# Altium PCB Speedometer_Tech.PcbDoc
Units mm, origin at the board's own origin, x right, y up, seen from the top; angles counter-clockwise.
Board outline 309.2 x 103.7 mm, 2 copper layers (Top Layer, Bottom Layer); 82 components, 96 nets, 507 pads, 0 vias.
Unrouted connection lines stored in the file: 137.
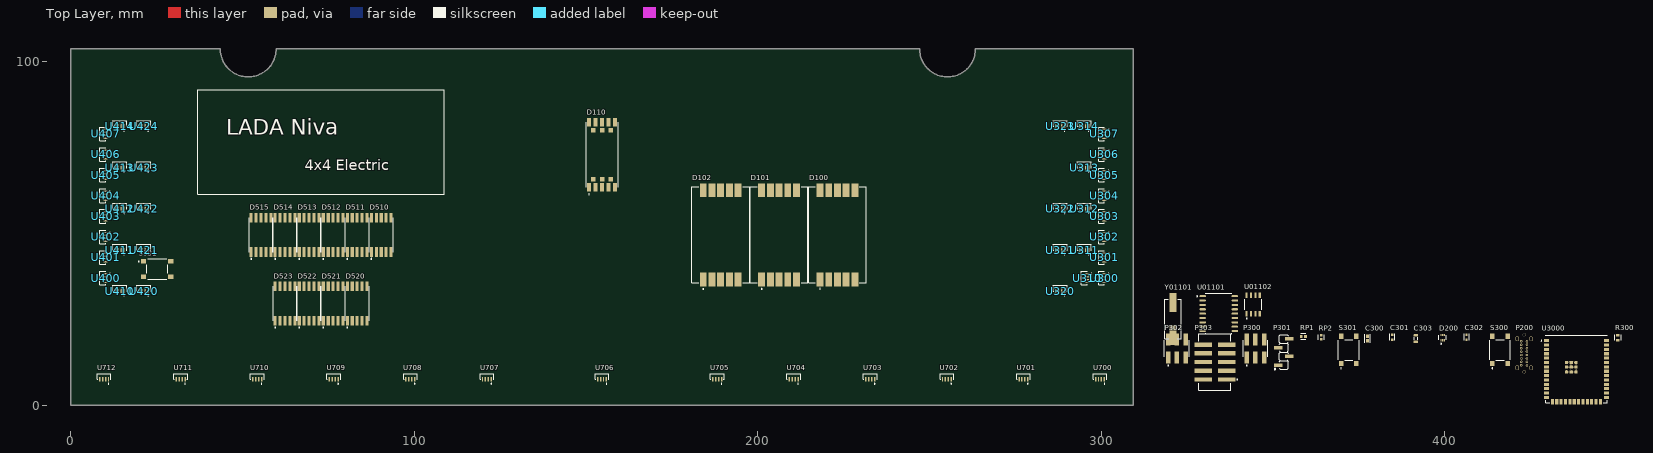
[diagram p0: Top Layer view]
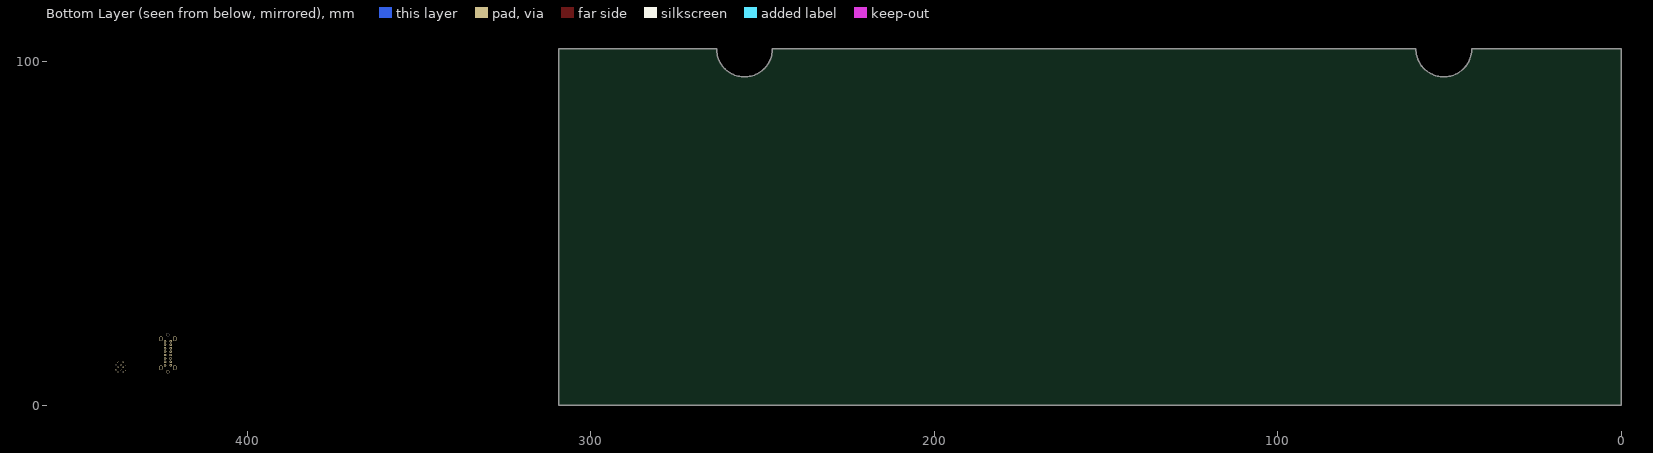
[diagram p1: Bottom Layer view, seen from below]

## Layer stack, top to bottom
Top Solder: solder mask 0.0102, Solder Resist, Dk 3.5
Top Layer: signal copper 0.0356
Dielectric 1: dielectric 0.32, FR-4, Dk 4.8
Bottom Layer: signal copper 0.0356
Bottom Solder: solder mask 0.0102, Solder Resist, Dk 3.5

## Board outline
0,0 0,103.7 43.45,103.7 ccw(c51.575,103.7) 59.7,103.7 247.05,103.7 ccw(c255.175,103.7) 263.3,103.7 309.2,103.7 309.2,0

## Design rules (kind name [scope] priority, off if disabled: settings)
Clearance [All] p1: gap=0.254 ignorepadtopadclearanceinfootprint=FALSE
PolygonConnect [All] p1: connectstyle=Relief reliefconductorwidth=0.254 reliefentries=4 polygonreliefangle="90 Angle" airgapwidth=0.254
RoutingVias [All] p1: holewidth=0.711 width=1.27 viastyle="Through Hole" minholewidth=0.711 minwidth=1.27 maxholewidth=0.711 maxwidth=1.27
SolderMaskExpansion [All] p1: expansion=0.102 istentingtop=FALSE
Width [All] p1: maxlimit=0.254 minlimit=0.254 preferedwidth=0.254
30 further rules are at their usual default settings.

## Classes and differential pairs
component class 70_Signalleuchten: U700 U701 U702 U703 U704 U705 U706 U707 U708 U709 U710 U711 U712
component class 40_Temp: U400 U401 U402 U403 U404 U405 U406 U407 U410 U411 U412 U413 U414 U420 U421 U422 U423 U424
component class 30_SOC: U300 U301 U302 U303 U304 U305 U306 U307 U310 U311 U312 U313 U314 U320 U321 U322 U323
component class 90_CAN: C0101 C01101 C01102 C01103 C01104 C01105 L0101 Q0101 R0105 R0106 R01101 U01101 U01102 Y01101
component class 10_Speed: D100 D101 D102 D110
component class 110_ESP32s3: C300 C301 C302 C303 D200 P200 P300 P301 P302 P303 R300 RP1 RP2 S300 S301 U3000
component class 50_Distance: D510 D511 D512 D513 D514 D515 D520 D521 D522 D523 S501

## Components (designator, comment, footprint, x,y, rotation, side; value= is the part's Value field where it differs from the comment)
C300 "GMK107BJ104KAHT" FP-0603-L_1_6_0_1-W_0_8_0-IPC_B 377.444,19.42 r90 top
C301 "1uF" FP-CGA3E-0_3-0_1-MFG 384.683,19.801 r90 top
C302 "1uF" FP-CGA3E-0_3-0_1-MFG 406.273,19.801 r90 top
C303 "Capacitor 22µF +/-40% 16V 0805" CAPC0805(2012)145_L 391.541,19.42 r90 top value=22µF
D100 "28mm 7-Segment" GS8011AR-G 223.133,49.6 r0 top
D101 "28mm 7-Segment" GS8011AR-G 206.133,49.6 r0 top
D102 "28mm 7-Segment" GS8011AR-G 189.133,49.6 r0 top
D110 "19mm 14-Segment, Alphanummerical" GS4011AG-G 154.6,72.898 r0 top
D200 "TPD2E1B06DRLR" FP-DRL0006A-MFG 399.288,19.674 r90 top
D510 "10mm 7-Segment" GS2011AG-G 90.32,49.6 r0 top
D511 "10mm 7-Segment" GS2011AG-G 83.32,49.6 r0 top
D512 "10mm 7-Segment" GS2011AG-G 76.32,49.6 r0 top
D513 "10mm 7-Segment" GS2011AG-G 69.32,49.6 r0 top
D514 "10mm 7-Segment" GS2011AG-G 62.32,49.6 r0 top
D515 "10mm 7-Segment" GS2011AG-G 55.32,49.6 r0 top
D520 "10mm 7-Segment" GS2011AG-G 83.32,29.6 r0 top
D521 "10mm 7-Segment" GS2011AG-G 76.32,29.6 r0 top
D522 "10mm 7-Segment" GS2011AG-G 69.32,29.6 r0 top
D523 "10mm 7-Segment" GS2011AG-G 62.32,29.6 r0 top
P200 "TYPEC-300D-BCP16H100" TYPEC-300D-BCP16H100-Footprint-1 423.037,15.102 r90 top
P300 "5-146130-2" TECO-5-146130-2_V 344.805,16.499 r0 top
P301 "M20-8770442R" HARWIN_M20-8770442R 353.06,15.483 r90 top
P302 "5-146130-2" TECO-5-146130-2_V 321.945,16.499 r0 top
P303 "HTSS-105-01-L-DV" SMTC-HTSS-105-01-X-DV 332.994,12.562 r90 top
R300 "1kΩ" FP-CRCW0603-e3-MFG 450.342,19.674 r90 top
RP1 "CRCW06035K10FKEA" FP-CRCW0603-e3-IPC_C 358.775,20.055 r0 top
RP2 "CRCW06035K10FKEA" FP-CRCW0603-e3-IPC_C 363.982,19.801 r90 top
S300 "" FP-PTS645SM43SMTR92LFS-MFG 416.052,16.118 r90 top
S301 "" FP-PTS645SM43SMTR92LFS-MFG 371.983,16.118 r90 top
S501 "" FP-PTS645SM43SMTR92LFS-MFG 25.1,39.6 r0 top
U300 "WS2812B-4020_2" LED_WS2812B-4020 300,37 r90 top
U301 "WS2812B-4020_2" LED_WS2812B-4020 300,43 r90 top
U302 "WS2812B-4020_2" LED_WS2812B-4020 300,49 r90 top
U303 "WS2812B-4020_2" LED_WS2812B-4020 300,55 r90 top
U304 "WS2812B-4020_2" LED_WS2812B-4020 300,61 r90 top
U305 "WS2812B-4020_2" LED_WS2812B-4020 300,67 r90 top
U306 "WS2812B-4020_2" LED_WS2812B-4020 300,73 r90 top
U307 "WS2812B-4020_2" LED_WS2812B-4020 300,79 r90 top
U310 "WS2812B-4020_2" LED_WS2812B-4020 295,37 r90 top
U311 "WS2812B-4020_2" LED_WS2812B-4020 295,46 r0 top
U312 "WS2812B-4020_2" LED_WS2812B-4020 295,58 r0 top
U313 "WS2812B-4020_2" LED_WS2812B-4020 295,70 r0 top
U314 "WS2812B-4020_2" LED_WS2812B-4020 295,82 r0 top
U320 "WS2812B-4020_2" LED_WS2812B-4020 288,34 r0 top
U321 "WS2812B-4020_2" LED_WS2812B-4020 288,46 r0 top
U322 "WS2812B-4020_2" LED_WS2812B-4020 288,58 r0 top
U323 "WS2812B-4020_2" LED_WS2812B-4020 288,82 r0 top
U400 "WS2812B-4020_2" LED_WS2812B-4020 9.2,37 r90 top
U401 "WS2812B-4020_2" LED_WS2812B-4020 9.2,43 r90 top
U402 "WS2812B-4020_2" LED_WS2812B-4020 9.2,49 r90 top
U403 "WS2812B-4020_2" LED_WS2812B-4020 9.2,55 r90 top
U404 "WS2812B-4020_2" LED_WS2812B-4020 9.2,61 r90 top
U405 "WS2812B-4020_2" LED_WS2812B-4020 9.2,67 r90 top
U406 "WS2812B-4020_2" LED_WS2812B-4020 9.2,73 r90 top
U407 "WS2812B-4020_2" LED_WS2812B-4020 9.2,79 r90 top
U410 "WS2812B-4020_2" LED_WS2812B-4020 14.2,34 r0 top
U411 "WS2812B-4020_2" LED_WS2812B-4020 14.2,46 r0 top
U412 "WS2812B-4020_2" LED_WS2812B-4020 14.2,58 r0 top
U413 "WS2812B-4020_2" LED_WS2812B-4020 14.2,70 r0 top
U414 "WS2812B-4020_2" LED_WS2812B-4020 14.2,82 r0 top
U420 "WS2812B-4020_2" LED_WS2812B-4020 21.2,34 r0 top
U421 "WS2812B-4020_2" LED_WS2812B-4020 21.2,46 r0 top
U422 "WS2812B-4020_2" LED_WS2812B-4020 21.2,58 r0 top
U423 "WS2812B-4020_2" LED_WS2812B-4020 21.2,70 r0 top
U424 "WS2812B-4020_2" LED_WS2812B-4020 21.2,82 r0 top
U700 "WS2812B-4020_2" LED_WS2812B-4020 299.556,8.35 r0 top
U701 "WS2812B-4020_2" LED_WS2812B-4020 277.269,8.35 r0 top
U702 "WS2812B-4020_2" LED_WS2812B-4020 254.982,8.35 r0 top
U703 "WS2812B-4020_2" LED_WS2812B-4020 232.695,8.35 r0 top
U704 "WS2812B-4020_2" LED_WS2812B-4020 210.408,8.35 r0 top
U705 "WS2812B-4020_2" LED_WS2812B-4020 188.122,8.35 r0 top
U706 "WS2812B-4020_2" LED_WS2812B-4020 154.6,8.35 r0 top
U707 "WS2812B-4020_2" LED_WS2812B-4020 121.078,8.35 r0 top
U708 "WS2812B-4020_2" LED_WS2812B-4020 98.791,8.35 r0 top
U709 "WS2812B-4020_2" LED_WS2812B-4020 76.504,8.35 r0 top
U710 "WS2812B-4020_2" LED_WS2812B-4020 54.217,8.35 r0 top
U711 "WS2812B-4020_2" LED_WS2812B-4020 31.931,8.35 r0 top
U712 "WS2812B-4020_2" LED_WS2812B-4020 9.644,8.35 r0 top
U01101 "MCP2515-I/SO" FP-C04-051-MFG 334.137,26.659 r0 top
U01102 "MCP2562FDT-E/SN" FP-C04-057-SN-MFG 344.17,29.326 r90 top
U3000 "ESP32WroomS3" ESP32WroomS3 429.514,18.785 r0 top
Y01101 "ABLS-16.000MHZ-K4T" FP-ABLS-MFG 320.802,25.135 r90 top

## Footprints (in the part's own frame and the unit in brackets; to place one, negate y for a bottom-side part, rotate by r counter-clockwise, add the part's x,y. Pads: shape width x height; smd on the part's side, far side on the other; paste and mask are expansions set on the pad)
CAPC0805(2012)145_L [mm] "Chip Capacitor, Body 2.0x1.2mm, Height 1.45mm, IPC High Density"
  rrect25% 0.76x1.3 smd: 1(-0.9,0) 2(0.89,0)
  silkscreen extent -0.3,-0.55 0.3,0.55, body extent -1,-0.6 1,0.6, height 1.45
ESP32WroomS3 [mm]
  rect 1.5x0.9 smd: 1(0,0) 2(0,-1.27) 3(0,-2.54) 4(0,-3.81) 5(0,-5.08) 6(0,-6.35) 7(0,-7.62) 8(0,-8.89) 9(0,-10.16) 10(0,-11.43) 11(0,-12.7) 12(0,-13.97) 13(0,-15.24) 14(0,-16.51) 27(17.5,-16.51) 28(17.5,-15.24) 29(17.5,-13.97) 30(17.5,-12.7) 31(17.5,-11.43) 32(17.5,-10.16) 33(17.5,-8.89) 34(17.5,-7.62) 35(17.5,-6.35) 36(17.5,-5.08) 37(17.5,-3.81) 38(17.5,-2.54) 39(17.5,-1.27) 40(17.5,0)
  rect 0.9x1.5 smd: 15(1.765,-17.76) 16(3.035,-17.76) 17(4.305,-17.76) 18(5.575,-17.76) 19(6.845,-17.76) 20(8.115,-17.76) 21(9.385,-17.76) 22(10.655,-17.76) 23(11.925,-17.76) 24(13.195,-17.76) 25(14.465,-17.76) 26(15.735,-17.76)
  rect 0.9x0.9 smd: 41(5.85,-9.12) 41(5.85,-7.72) 41(5.85,-6.32) 41(7.25,-9.12) 41(7.25,-7.72) 41(7.25,-6.32) 41(8.65,-9.12) 41(8.65,-7.72) 41(8.65,-6.32)
  round 0.4 hole 0.2 mask+0: 41(5.85,-8.42) 41(5.85,-7.02) 41(6.55,-9.12) 41(6.55,-7.72) 41(6.55,-6.32) 41(7.25,-8.42) 41(7.25,-7.02) 41(7.95,-9.12) 41(7.95,-7.72) 41(7.95,-6.32) 41(8.65,-8.42) 41(8.65,-7.02)
  silkscreen extent -1.55,-18.01 17.78,1.52, body extent -0.24,-17.98 17.76,1.22, height 3.35
FP-0603-L_1_6_0_1-W_0_8_0-IPC_B [mm]
  rect 1.058x0.912 smd paste+0 mask+0: 1(-0.677,0) 2(0.677,0)
  silkscreen extent -1.21,-0.86 1.21,0.86, body extent -1.46,-0.71 1.46,0.71, height 0.25
FP-ABLS-MFG [mm]
  rect 5.6x2.1 smd paste+0 mask+0: 1(-4.75,0) 2(4.75,0)
  silkscreen extent -5.77,-2.42 5.77,2.42, body extent -7.65,-2.52 7.65,2.52, height 0.25
FP-C04-051-MFG [mm]
  rrect100% 1.9x0.6 smd paste+0 mask+0: 1(-4.7,5.08) 2(-4.7,3.81) 3(-4.7,2.54) 4(-4.7,1.27) 5(-4.7,0) 6(-4.7,-1.27) 7(-4.7,-2.54) 8(-4.7,-3.81) 9(-4.7,-5.08) 10(4.7,-5.08) 11(4.7,-3.81) 12(4.7,-2.54) 13(4.7,-1.27) 14(4.7,0) 15(4.7,1.27) 16(4.7,2.54) 17(4.7,3.81) 18(4.7,5.08)
  silkscreen extent -6.42,-5.87 3.8,5.87, body extent -5.75,-6.12 5.75,6.12, height 0.25
FP-C04-057-SN-MFG [mm]
  rect 1.55x0.6 smd paste+0 mask+0: 1(-2.7,1.905) 2(-2.7,0.635) 3(-2.7,-0.635) 4(-2.7,-1.905) 5(2.7,-1.905) 6(2.7,-0.635) 7(2.7,0.635) 8(2.7,1.905)
  silkscreen extent -4.22,-2.5 1.55,2.5, body extent -3.57,-2.75 3.57,2.75, height 0.25
FP-CGA3E-0_3-0_1-MFG [mm]
  rect 0.7x0.7 smd paste+0 mask+0: 1(-0.7,0) 2(0.7,0)
  silkscreen extent -0.95,-0.72 0.95,0.72, body extent -1.15,-0.65 1.15,0.65, height 0.25
FP-CRCW0603-e3-IPC_C [mm]
  rect 0.735x0.862 smd paste+0 mask+0: 1(-0.615,0) 2(0.615,0)
  silkscreen extent -0.75,-0.85 0.75,0.85, body extent -1.08,-0.58 1.08,0.58, height 0.25
FP-CRCW0603-e3-MFG [mm]
  rect 0.75x1 smd paste+0 mask+0: 1(-0.75,0) 2(0.75,0)
  silkscreen extent -0.8,-0.9 0.8,0.9, body extent -1.22,-0.6 1.22,0.6, height 0.25
FP-DRL0006A-MFG [mm]
  rrect33% 0.67x0.3 smd paste+0 mask+0: 1(-0.74,0.5) 2(-0.74,0) 3(-0.74,-0.5) 4(0.74,-0.5) 5(0.74,0) 6(0.74,0.5)
  silkscreen extent -1.9,-1.05 0.65,1.05, body extent -1.17,-1.1 1.17,1.1, height 0.25
FP-PTS645SM43SMTR92LFS-MFG [mm]
  rect 1.55x1.3 smd paste+0 mask+0: 1(-3.975,2.25) 2(3.975,2.25) 3(-3.975,-2.25) 4(3.975,-2.25)
  silkscreen extent -5.52,-3 3,3, body extent -4.85,-3.1 4.85,3.1, height 0.25
GS2011AG-G [mm]
  rect 0.9x2.8 smd: 1(-2.88,-5) 2(-1.44,-5) 4(1.44,-5) 5(2.88,-5) 6(2.88,5) 7(1.44,5) 9(-1.44,5) 10(-2.88,5) A(0,-5) A(0,5)
  silkscreen extent -3.45,-7.13 3.45,5, body extent -3.45,-5 3.45,5, height 3
GS4011AG-G [mm] "SMD,19x9.3mm LED Segment Displays ROHS, Alphanummerical"
  rect 1.2x2.5 smd: 1(-3.8,-9.5) 2(-1.9,-9.5) 4(1.9,-9.5) 5(3.8,-9.5) 12(3.8,9.5) 13(1.9,9.5) 14(0,9.5) 15(-1.9,9.5) 16(-3.8,9.5) A(0,-9.5)
  rect 1.3x1.3 smd: 6(2.6,-7.1) 7(0,-7.1) 8(-2.6,-7.1) 9(-2.6,7.1) 10(0,7.1) 11(2.6,7.1)
  silkscreen extent -4.65,-11.63 4.65,9.5, body extent -4.65,-9.5 4.65,9.5, height 3.75
GS8011AR-G [mm]
  rect 2x4 smd: 1(-5.08,-13) 2(-2.54,-13) 4(2.54,-13) 5(5.08,-13) 6(5.08,13) 7(2.54,13) 9(-2.54,13) 10(-5.08,13) A(0,-13) A(0,13)
  silkscreen extent -8.4,-15.88 8.4,14, body extent -8.38,-13.97 8.38,13.97, height 3.75
HARWIN_M20-8770442R [mm]
  rect 1x2.51 smd: 1(-3.81,1.655) 2(-1.27,-1.655) 3(1.27,1.655) 4(3.81,-1.655)
  silkscreen extent -5.18,-1.25 5.08,2.76
LED_WS2812B-4020 [mm]
  rect 0.42x1.3 smd: 1(1.275,-0.85) 2(0.425,-0.85) 3(-0.425,-0.85) 4(-1.275,-0.85)
  silkscreen extent -1.99,-2.2 1.99,0.85, body extent -1.99,-1 1.99,1, height 1.73
SMTC-HTSS-105-01-X-DV [mm] "High Temp Top Shroud, 2x5 Pins, Vertical, 2.54mm Pitch, Male"
  rect 1.27x5.08 smd: 1(-5.08,-3.43) 2(-5.08,3.43) 3(-2.54,-3.43) 4(-2.54,3.43) 5(0,-3.43) 6(0,3.43) 7(2.54,-3.43) 8(2.54,3.43) 9(5.08,-3.43) 10(5.08,3.43)
  silkscreen extent -8.25,-6.65 8.25,4.63, body extent -8.25,-5.59 8.25,5.59, height 10.16
TECO-5-146130-2_V [mm] "Header, 6-Leads, Body 7.21x4.88mm, Pitch 2.54mm"
  rect 1.27x3.56 smd: 1(-2.54,-2.605) 2(-2.54,2.605) 3(0,-2.605) 4(0,2.605) 5(2.54,-2.605) 6(2.54,2.605)
  silkscreen extent -3.6,-5.06 3.6,2.44, body extent -3.61,-3.77 3.61,3.64, height 9.74
TYPEC-300D-BCP16H100-Footprint-1 [mm]
  round 0.7 hole 0.4: A1(-3.5,0.83) A4(-2.5,0.83) A5(-1.5,0.83) A6(-0.5,0.83) A7(0.5,0.83) A8(1.5,0.83) A9(2.5,0.83) A12(3.5,0.83) B1(3.5,-0.82) B4(2.5,-0.82) B5(1.5,-0.82) B6(0.5,-0.82) B7(-0.5,-0.82) B8(-1.5,-0.82) B9(-2.5,-0.82) B12(-3.5,-0.82)
  round 0.9 hole 0.9 unplated: M(-5.4,0) M(5.4,0)
  oval 1.4x1 hole 0.6 slot 1 at 0 deg: M_GND(-4.225,-2.02) M_GND(-4.225,2.02) M_GND(4.225,-2.02) M_GND(4.225,2.02)

## Part data
C300: library part CMP-14477-002194-3, "Ceramic Capacitor Automotive 0.1uF ±10% 35V X5R 0603", Capacitance=100nF, Case Code (Imperial)=0603, Case Code (Metric)=1608, Dielectric=X5R, Max Operating Temperature=85°C, Min Operating Temperature=-55°C, Ratings=AEC-Q200, Tolerance=10%, Voltage Rating=35V, Case/Package=0603, Halogen Free="Halogen Free", Height=900µm, Lead Free="Lead Free", Length=1.6002mm, Material=Ceramic, Max Length=1.7mm, Max Thickness=900µm, Max Width=900µm, Min Length=1.5mm, Min Thickness=700µm, Min Width=700µm, Mount="Surface Mount", NexarPartId=29103042, Packaging=Digi-Reel®, RoHS=Compliant, Termination=SMD/SMT, Thickness=889µm, Voltage Rating (DC)=35V, Width=800µm
C301 C302: library part CMP-08246-002551-1, "Cap Ceramic 1uF 35V X7R 10% Pad SMD 0603 +125°C Automotive T/R / CGA3E1X7R1V105K080AC", Case Code (Imperial)=0603, Case Code (Metric)=1608, Dielectric=X7R, Max Operating Temperature=125°C, Min Operating Temperature=-55°C, Package Quantity=4000, Ratings=AEC-Q200, Tolerance=10%, Voltage Rating=35V, Capacitance=1uF, Case/Package=0603, Height=0.8mm, Length=0.063inch, Mount="Surface Mount", Packaging="Tape and Reel", Termination=SMD/SMT, Thickness=0.035inch, Voltage Rating (DC)=35V, Weight=7.1E-05oz, Width=0.031inch
C303: library part CMP-001-00081-4, "Chip Capacitor, 22µF +/-40%, 16V, 0805, Thickness 1.45 mm", Case/Package=0805, Max Operating Temperature=85°C, Min Operating Temperature=-55°C, Tolerance=5%, Voltage Rating=16V, Mounting Technology=SMT, Pins=2
D100 D101 D102: library part GS8011AR-G, "SMD, 28x16.8mm 7-Segment"
D110: library part GS4011AG-G, "SMD, 19x9.3mm 14-Segment, Alphanummerical"
D200: library part CMP-04985-000003-1, "TVS DIODE 5.5V 15V 6SOT", Ambient Temperature Range High=+125°C, Ambient Temperature Range Low=-40°C, Breakdown Voltage=7V, Clamping Voltage=15V, Manufacturer="Texas Instruments", Package=DRL0006A, Peak Pulse Current=2.5A, Peak Pulse Power=35W, Reverse Standoff Voltage=5.5V, Temperature="-40°C to +125°C", Automotive=No, Category=Diode, ComponentLink2Description=Datasheet, ComponentLink2URL=http://www.ti.com/lit/ds/symlink/tpd2e1b06.pdf, Device Class L1="Circuit Protection", Device Class L2="ESD and Circuit Protection ICs", Device Class L3=unset, Digikey Description="TVS DIODE 5.5V 15V 6SOT", Direction=Bidirectional, Height=0.6mm, Interface=I2C,USB,LVDS,Other, Lead Free=Yes, Manufacturer Part Number=TPD2E1B06DRLR, Mouser Description="ESD Suppressors / TVS Diodes 2-CH system level ESD protect device", Number Of Channels=2, Octopart=https://octopart.com/tpd2e1b06drlr-texas+instruments-30488860, RoHS=TRUE, Standoff Height=0mm, Temperature Range High=+125°C, Temperature Range Low=-40°C
D510 D511 D512 D513 D514 D515 D520 D521 D522 D523: library part GS2011AG-G, "SMD, 10x6.9mm 7-Segment"
P200: library part CMP-002-00081-3, "Vertical USB Type C Connector"
P300 P302: library part CMP-1684-00011-1, "Male Header, Pitch 2.54 mm, 2 x 3 Position, Height 8.13 mm, -65 to 125 degC, RoHS, Tube", Max Operating Temperature="150 degC", Max Supply Voltage="5.5 V", Min Operating Temperature="-40 degC", Min Supply Voltage="4.5 V", Nominal Supply Voltage="5 V", Package Quantity=3000, ComponentLink1Description="Manufacturer URL", ComponentLink1URL=http://www.te.com/, ComponentLink2Description=Datasheet, ComponentLink2URL=http://www.te.com/commerce/DocumentDelivery/DDEController?Action=showdoc&DocId=Customer+Drawing%7F146130%7FM%7Fpdf%7FEnglish%7FENG_CD_146130_M.pdf%7F5-146130-2, DatasheetVersion=Oct-15, Mount="Surface Mount", PackageDescription="Male Header, Pitch 2.54 mm, 2 x 3 Position, Height 8.13 mm", PackageReference=5-146130-2, Packaging="Tape and Reel", Pins=3, Radiation Hardening=No, RoHSCompliant=true
P301: "Connector Header Surface Mount 4 position 0.100 (2.54mm)", Package=None, Availability="In Stock", Check_prices=https://www.snapeda.com/parts/M20-8770442R/Harwin+Inc./view-part/?ref=eda, MF="Harwin Inc.", MP=M20-8770442R, Price=None, Purchase-URL=https://pricing.snapeda.com/search?q=M20-8770442R&ref=eda, SnapEDA_Link=https://www.snapeda.com/parts/M20-8770442R/Harwin+Inc./view-part/?ref=snap
P303: library part CMP-1024-00042-1, "Shrouded .025\" SQ Post Header, Surface Mount, Vertical, -55 to 125 degC, 2.54 mm Pitch, 10-Pin, Male, RoHS", Manufacturer=Samtec, Temperature Range="-55 to 125 degC", ComponentLink1Description="Manufacturer URL", ComponentLink1URL=http://www.samtec.com, ComponentLink2Description=Datasheet, ComponentLink2URL=http://www.samtec.com/documents/webfiles/pdf/htss.pdf, ComponentLink3Description="Package Specification", ComponentLink3URL=http://www.samtec.com/documents/webfiles/cpdf/HTSS-1XX-01-XX-DV-X-XX-X-XX-MKT.pdf, DatasheetVersion=F-214, Mounting Technology="Surface Mount", Orientation=Vertical, PackageDescription="High Temp Top Shroud", PackageReference=HTSS-105-01-X-DV, PackageVersion="Z, 7/2001", PartNumber=HTSS-105-01-L-DV, Pitch="2.54 mm", RoHS=True
R300: library part CMP-1666-00003-5, "RES Thick Film, 1kΩ, 1%, 0.1W, 100ppm/°C, 0603, CRCW06031K00FKEA", Case Code (Imperial)=0603, Case Code (Metric)=1608, Max Operating Temperature=155°C, Max Power Dissipation=100mW, Min Operating Temperature=-55°C, Package Quantity=10, Resistance=1kR, Temperature Coefficient=100ppm/°C, Tolerance=1%, Voltage Rating=75V, Case/Package=0603, Composition="Thick Film", Contact Plating=Tin, Depth=0.85mm, Features="Automotive AEC-Q200", Height=0.45mm, Lead Free="Lead Free", Length=1.55mm, Military Standard=Not, Mount="Surface Mount", Number of Pins=2, Number of Terminations=2, Packaging="Tape and Reel", Power Rating=100mW, Radiation Hardening=No, Termination=SMD/SMT, Voltage Rating (DC)=75V, Weight=7.1E-05oz, Width=0.033inch
RP1 RP2: library part CMP-1012-00590-3, "RES Thick Film, 5.1kΩ, 1%, 0.1W, 100ppm/°C, 0603", Case Code (Imperial)=0603, Case Code (Metric)=1608, Max Operating Temperature=155°C, Min Operating Temperature=-55°C, Package Quantity=5000, Power Rating=100mW, Resistance=5.1kR, Temperature Coefficient=100ppm/°C, Tolerance=1%, Voltage Rating=75V, Case/Package=0603, Composition="Thick Film", Contact Plating=Tin, Depth=0.85mm, Height=0.45mm, Lead Free="Lead Free", Length=1.55mm, Military Standard=Not, Mount="Surface Mount", Packaging="Tape and Reel", Radiation Hardening=No, Termination=SMD/SMT, Voltage Rating (DC)=75V, Weight=7.1E-05oz, Width=0.85mm
S300 S301 S501: library part CMP-2000-05160-2, "SWITCH TACTILE SPST-NO 0.05A 12V / PTS645SM43SMTR92LFS", Case/Package=SMD/SMT, Color=Black, Contact Resistance=100mR, Current Rating=50mA, Max Operating Temperature=60°C, Max Voltage Rating (DC)=12V, Min Operating Temperature=-20°C, Operating Force=160gf, Package Quantity=1, Actuator Length=0.85mm, Actuator Material=Nylon, Actuator Type=Standard, Contact Material=Silver, Contact Plating=Silver, Depth=9mm, Illumination Type=Non-Illuminated, Lead Free="Lead Free", Length=6mm, Max Current Rating=50mA, Mechanical Life=100000Cycles, Mount="Surface Mount", Orientation=Straight, Packaging="Tape and Reel", REACH SVHC="No SVHC", Switch Function=Off-Mom, Termination="Gull Wing", Throw Configuration=SPST, Voltage Rating (DC)=12V
U300 U301 U302 U303 U304 U305 U306 U307 U310 U311 U312 U313 U314 U320 U321 U322 U323 U400 U401 U402 U403 U404 U405 U406 U407 U410 U411 U412 U413 U414 U420 U421 U422 U423 U424 U700 U701 U702 U703 U704 U705 U706 U707 U708 U709 U710 U711 U712: "12mA RGB SMD,2x4mm Light Emitting Diodes", Package=Package, Availability="Not in stock", Check_prices=https://www.snapeda.com/parts/WS2812B-4020/Worldsemi/view-part/?ref=eda, MF=Worldsemi, MP=WS2812B-4020, Price=None, SnapEDA_Link=https://www.snapeda.com/parts/WS2812B-4020/Worldsemi/view-part/?ref=snap
U01101: library part CMP-0186-00133-3, "IC CAN CONTROLLER W/SPI 18SOIC", Ambient Temperature Range High=+125°C, Ambient Temperature Range Low=-65°C, Manufacturer=Microchip, Max Supply Voltage=5.5V, Min Supply Voltage=2.7V, Nominal Supply Current=10mA, Package=C04-051, Temperature="-40°C to +85°C", Temperature Range High=+85°C, Temperature Range Low=-40°C, Automotive=No, Category=IC, ComponentLink2Description=Datasheet, ComponentLink2URL=http://ww1.microchip.com/downloads/en/DeviceDoc/MCP2515-Stand-Alone-CAN-Controller-with-SPI-20001801J.pdf, Device Class L1="Integrated Circuits (ICs)", Device Class L2="Interface ICs", Device Class L3=Controllers, Digikey Description="IC CAN CONTROLLER W/SPI 18SOIC", Footprint Url=http://ww1.microchip.com/downloads/en/DeviceDoc/18L_SOIC_Wide_7.50_SO_C04-0051D.pdf, Function=Controller, Height=2.65mm, Interface=SPI,CAN, Ipc Land Pattern Name=SOIC127P1030X265-18, Lead Free=Yes, Manufacturer Part Number=MCP2515-I/SO, Mouser Description="CAN Interface IC W/ SPI Interface", Octopart=https://octopart.com/mcp2515-i%2Fso-microchip-430187, RoHS=TRUE, Standoff Height=0.1mm
U01102: library part CMP-06279-000005-1, "IC TRANSCEIVER 1/1 8SOIC", Case/Package=SOIC, Max Operating Temperature=125°C, Max Supply Voltage=5.5V, Min Operating Temperature=-40°C, Min Supply Voltage=4.5V, Operating Supply Current=70mA, Package Quantity=3300, Data Rate=8Mbps, Mount="Surface Mount", Number of Pins=8, Number of Transceivers=1, Packaging="Tape and Reel", Receiver Hysteresis=200mV, Weight=0.019048oz
U3000: library part CMP-017-000002-1, Design Item ID=ESP32WroomS3, Source=Schaltdose.SchLib
Y01101: library part CMP-27762-000003-1, "CRYSTAL 16.0000MHZ 18PF SMD", Frequency=16MHz, Load Capacitance=18pF, Manufacturer=Abracon, Package=ABLS, Temperature="-40°C to +125°C", Temperature Range High=+125°C, Temperature Range Low=-40°C, Tolerance=30ppm, Automotive=No, Category=Crys, ComponentLink2Description=Datasheet, ComponentLink2URL=https://abracon.com/Resonators/abls.pdf, Device Class L1="Passive Components", Device Class L2="Crystals / Oscillators", Device Class L3=Crystals, Digikey Description="CRYSTAL 16.0000MHZ 18PF SMD", Esr=40Ω, Height=4.3mm, Lead Free=Yes, Manufacturer Part Number=ABLS-16.000MHZ-K4T, Mouser Description="Crystal 16MHz ±30ppm (Tol) ±50ppm (Stability) 18pF FUND 40Ohm 2-Pin HC-49/US SMD T/R", Octopart=https://octopart.com/abls-16.000mhz-k4t-abracon-18618626, RoHS=TRUE, Series=ABLS, Stability=50ppm, Standoff Height=0mm

## Nets (pads, with @x,y where several pads share a name; then routed paths per layer and width w, separated by ;. In a path a pad name is that pad's centre, name@x,y a point inside that pad or via, vN(x,y) a via of type N, cw(c..) or ccw(c..) an arc to the next point about the centre after c; other vN are vias at no path point)
3V3: C302.1 C303.2 P302.2 P303.1 R300.1 U01101.18 U01102.5 U3000.2
5V: P200.A4 P200.A9 P200.B4 P200.B9 P300.1 P302.1 U01102.3
CAN_H: U01102.7
CAN_L: U01102.6
CS1: U3000.19
CS2: U3000.20
CS3: U3000.21
CS4: U3000.22
CS5: U3000.8
CS6: U3000.9
CS7: U3000.10
CS8: U3000.11
CSE1: U3000.17
CSE2: U3000.18
EN: C301.1 P300.4 P301.3 P303.10 R300.2 S300.3 U3000.3
GND: C301.2 C302.2 C303.1 D200.2 D200.3 D200.4 D200.6 P200.A1 P200.A12 P200.B1 P200.B12 P200.M_GND P300.5 P300.6 P301.4 P302.4 P302.6 P303.3 P303.5 P303.9 RP1.2 RP2.2 S300.1 S301.1 U01101.9 U01102.2 U01102.8 U3000.1 U3000.40 U3000.41
K1: U3000.4
K2: U3000.5
K3: U3000.6
K4: U3000.7
K5: U3000.12
K6: U3000.28
K7: U3000.29
K8: U3000.30
MISO: U01101.15
MOSI: U01101.14
MTCK: P303.4 U3000.32
MTDI: P303.8 U3000.34
MTDO: P303.6 U3000.33
MTMS: P303.2 U3000.35
NetC0101_1: 
NetC300_1: C300.1 S300.4
NetC300_2: C300.2 S300.2
NetC01102_2: U01101.8 Y01101.1
NetC01103_2: U01101.7 Y01101.2
NetL0101_1: 
NetL0101_2: 
NetP200_A5: P200.A5 RP1.1
NetP200_B5: P200.B5 RP2.1
NetR01101_1: U01101.17
NetS301_3: S301.3 U3000.27
NetU300_3: U300.3 U301.1
NetU301_3: U301.3 U302.1
NetU302_3: U302.3 U303.1
NetU303_3: U303.3 U304.1
NetU304_3: U304.3 U305.1
NetU305_3: U305.3 U306.1
NetU306_3: U306.3 U307.1
NetU310_3: U310.3 U311.1
NetU311_3: U311.3 U312.1
NetU312_3: U312.3 U313.1
NetU313_3: U313.3 U314.1
NetU320_3: U320.3 U321.1
NetU321_3: U321.3 U322.1
NetU322_3: U322.3 U323.1
NetU400_3: U400.3 U401.1
NetU401_3: U401.3 U402.1
NetU402_3: U402.3 U403.1
NetU403_3: U403.3 U404.1
NetU404_3: U404.3 U405.1
NetU405_3: U405.3 U406.1
NetU406_3: U406.3 U407.1
NetU410_3: U410.3 U411.1
NetU411_3: U411.3 U412.1
NetU412_3: U412.3 U413.1
NetU413_3: U413.3 U414.1
NetU420_3: U420.3 U421.1
NetU421_3: U421.3 U422.1
NetU422_3: U422.3 U423.1
NetU423_3: U423.3 U424.1
NetU700_3: U700.3 U701.1
NetU701_3: U701.3 U702.1
NetU702_3: U702.3 U703.1
NetU703_3: U703.3 U704.1
NetU704_3: U704.3 U705.1
NetU705_3: U705.3 U706.1
NetU706_3: U706.3 U707.1
NetU707_3: U707.3 U708.1
NetU708_3: U708.3 U709.1
NetU709_3: U709.3 U710.1
NetU710_3: U710.3 U711.1
NetU711_3: U711.3 U712.1
NetU01101_12: U01101.12
NetU01101_16: U01101.16
RX: P300.3 P301.2 U3000.36
RXCAN: U01101.2 U01102.4
SCL: P302.5 U3000.38
SCLK: U01101.13
SDA: P302.3 U3000.39
SigERR: U3000.31
SigStat: U3000.25
SigWlan: U3000.24
TX: P300.2 P301.1 U3000.37
TXCAN: U01101.1 U01102.1
"USB D+": D200.5 P200.A6 P200.B6 U3000.14
"USB D-": D200.1 P200.A7 P200.B7 U3000.13
pads on no net: D100.1 D100.2 D100.4 D100.5 D100.6 D100.7 D100.9 D100.10 D100.A D101.1 D101.2 D101.4 D101.5 D101.6 D101.7 D101.9 D101.10 D101.A D102.1 D102.2 D102.4 D102.5 D102.6 D102.7 D102.9 D102.10 D102.A D110.1 D110.2 D110.4 D110.5 D110.6 D110.7 D110.8 D110.9 D110.10 D110.11 D110.12 D110.13 D110.14 D110.15 D110.16 D110.A D510.1 D510.2 D510.4 D510.5 D510.6 D510.7 D510.9 D510.10 D510.A D511.1 D511.2 D511.4 D511.5 D511.6 D511.7 D511.9 D511.10 D511.A D512.1 D512.2 D512.4 D512.5 D512.6 D512.7 D512.9 D512.10 D512.A D513.1 D513.2 D513.4 D513.5 D513.6 D513.7 D513.9 D513.10 D513.A D514.1 D514.2 D514.4 D514.5 D514.6 D514.7 D514.9 D514.10 D514.A D515.1 D515.2 D515.4 D515.5 D515.6 D515.7 D515.9 D515.10 D515.A D520.1 D520.2 D520.4 D520.5 D520.6 D520.7 D520.9 D520.10 D520.A D521.1 D521.2 D521.4 D521.5 D521.6 D521.7 D521.9 D521.10 D521.A D522.1 D522.2 D522.4 D522.5 D522.6 D522.7 D522.9 D522.10 D522.A D523.1 D523.2 D523.4 D523.5 D523.6 D523.7 D523.9 D523.10 D523.A P200.A8 P200.B8 P200.M P303.7 S301.2 S301.4 S501.1 S501.2 S501.3 S501.4 U300.1 U300.2 U300.4 U301.2 U301.4 U302.2 U302.4 U303.2 U303.4 U304.2 U304.4 U305.2 U305.4 U306.2 U306.4 U307.2 U307.3 U307.4 U310.1 U310.2 U310.4 U311.2 U311.4 U312.2 U312.4 U313.2 U313.4 U314.2 U314.3 U314.4 U320.1 U320.2 U320.4 U321.2 U321.4 U322.2 U322.4 U323.2 U323.3 U323.4 U400.1 U400.2 U400.4 U401.2 U401.4 U402.2 U402.4 U403.2 U403.4 U404.2 U404.4 U405.2 U405.4 U406.2 U406.4 U407.2 U407.3 U407.4 U410.1 U410.2 U410.4 U411.2 U411.4 U412.2 U412.4 U413.2 U413.4 U414.2 U414.3 U414.4 U420.1 U420.2 U420.4 U421.2 U421.4 U422.2 U422.4 U423.2 U423.4 U424.2 U424.3 U424.4 U700.1 U700.2 U700.4 U701.2 U701.4 U702.2 U702.4 U703.2 U703.4 U704.2 U704.4 U705.2 U705.4 U706.2 U706.4 U707.2 U707.4 U708.2 U708.4 U709.2 U709.4 U710.2 U710.4 U711.2 U711.4 U712.2 U712.3 U712.4 U01101.3 U01101.4 U01101.5 U01101.6 U01101.10 U01101.11 U3000.15 U3000.16 U3000.23 U3000.26

## Silkscreen, mask and mechanical layers (free items; w line width, h text height)
Top Overlay:
  lines w0.254: 36.931,61.45 36.931,91.8 108.71,91.8 108.71,61.45 36.931,61.45
  text "LADA Niva" at 45.212,78.74 h4.57
  text "4x4 Electric" at 68.072,68.422 h3.05
Mechanical 1:
  lines w0.254: 0,8.35 9.644,8.35 ; 21.787,8.35 41.574,8.35 ; 299.557,8.35 309.2,8.35 ; 0,0 0,103.7 43.45,103.7 ccw(c51.575,103.7) 59.7,103.7 247.05,103.7 ccw(c255.175,103.7) 263.3,103.7 309.2,103.7 309.2,0 0,0 ; 152.322,31.305 171.133,82.988 176.771,80.936 157.96,29.253 152.322,31.305 ; 171.133,77 241.133,77 241.133,83 171.133,83 171.133,77
Board:
  lines w0.254: 19.287,8.35 21.787,8.35 ; 31.931,8.35 72.82,8.35 ; 113.927,6.477 195.707,6.477 ; 195.49,8.35 277.269,8.35 ; 236.351,9.144 277.241,9.144